# Altium PCB high_voltage_controller.PcbDoc (part 1 of 4)
Units mil, origin at the board's own origin, x right, y up, seen from the top; angles counter-clockwise.
Board outline 3135 x 1815 mil, 4 copper layers (Signal 1, Ground, Power, Signal 2), stack 23.756 mil thick; 57 components, 42 nets, 253 pads, 87 vias.
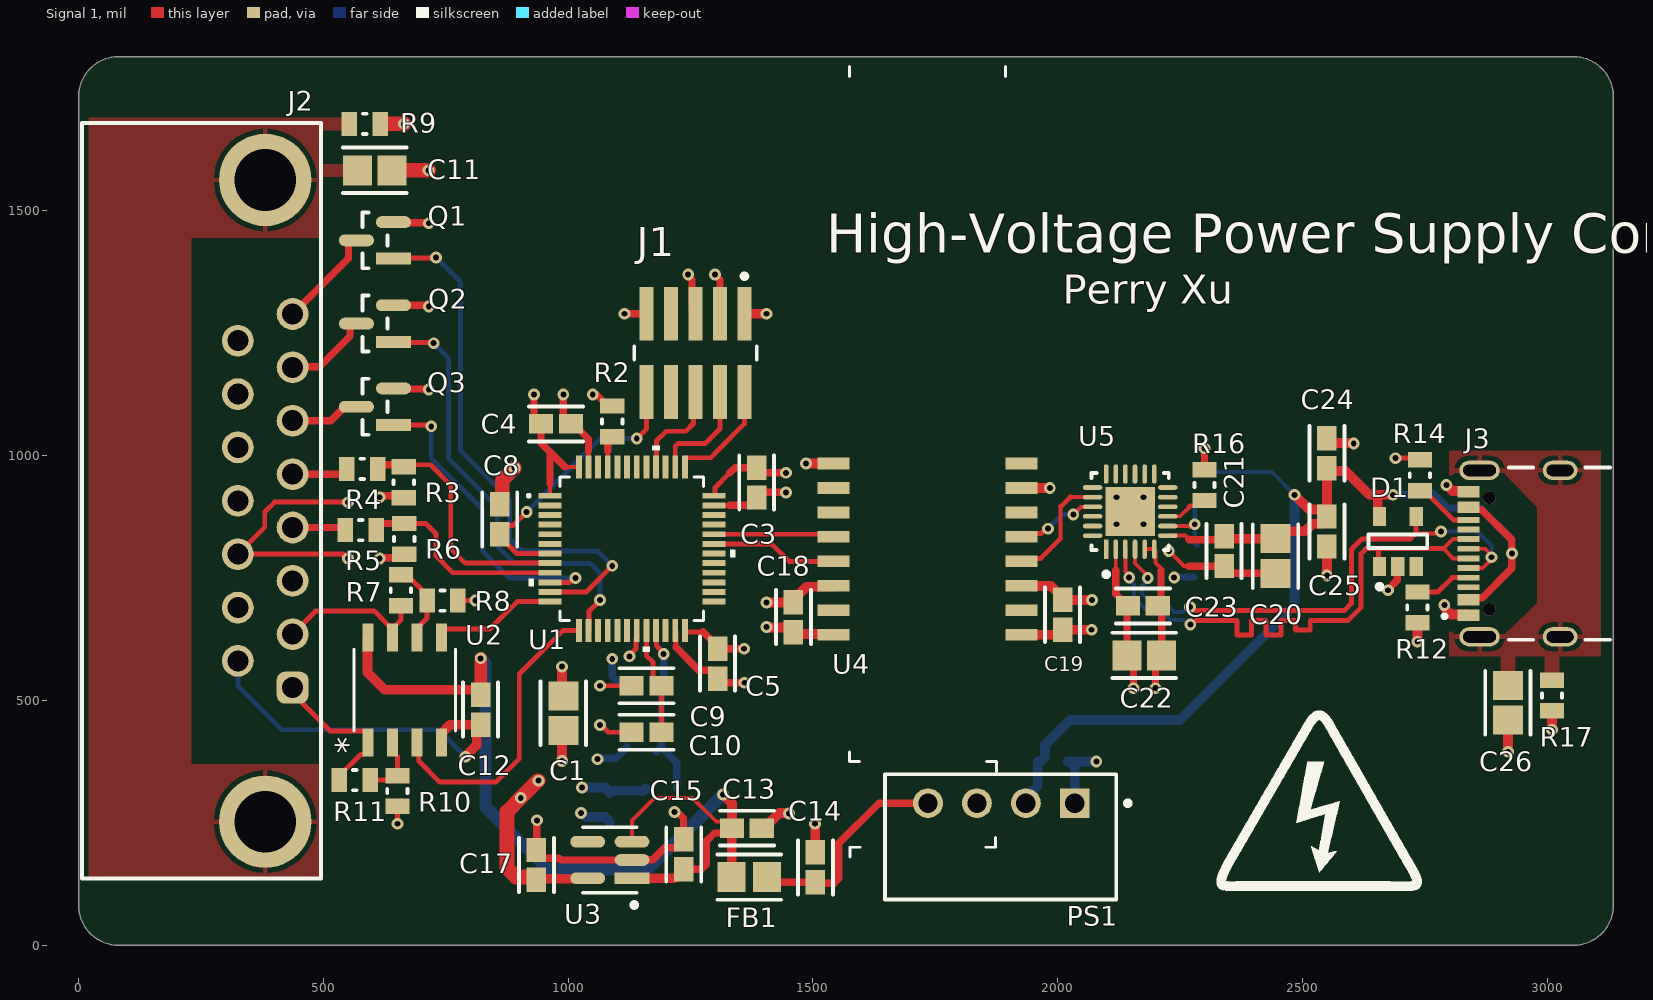
[diagram p0: Signal 1 view]
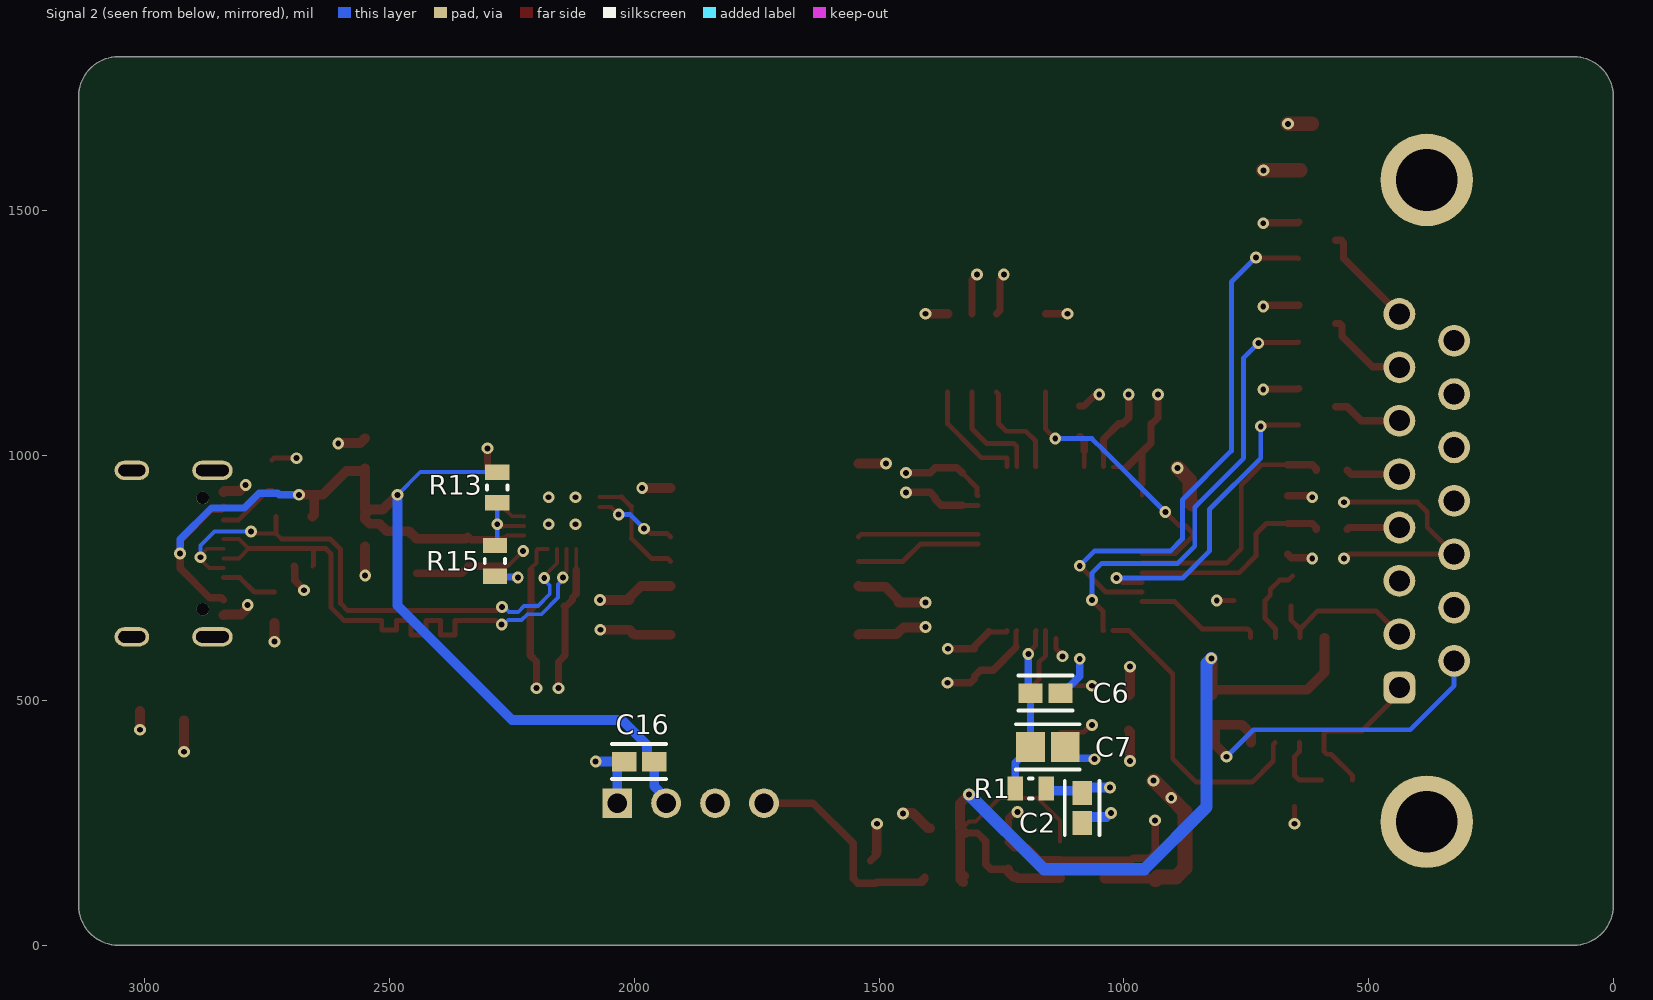
[diagram p1: Signal 2 view, seen from below]
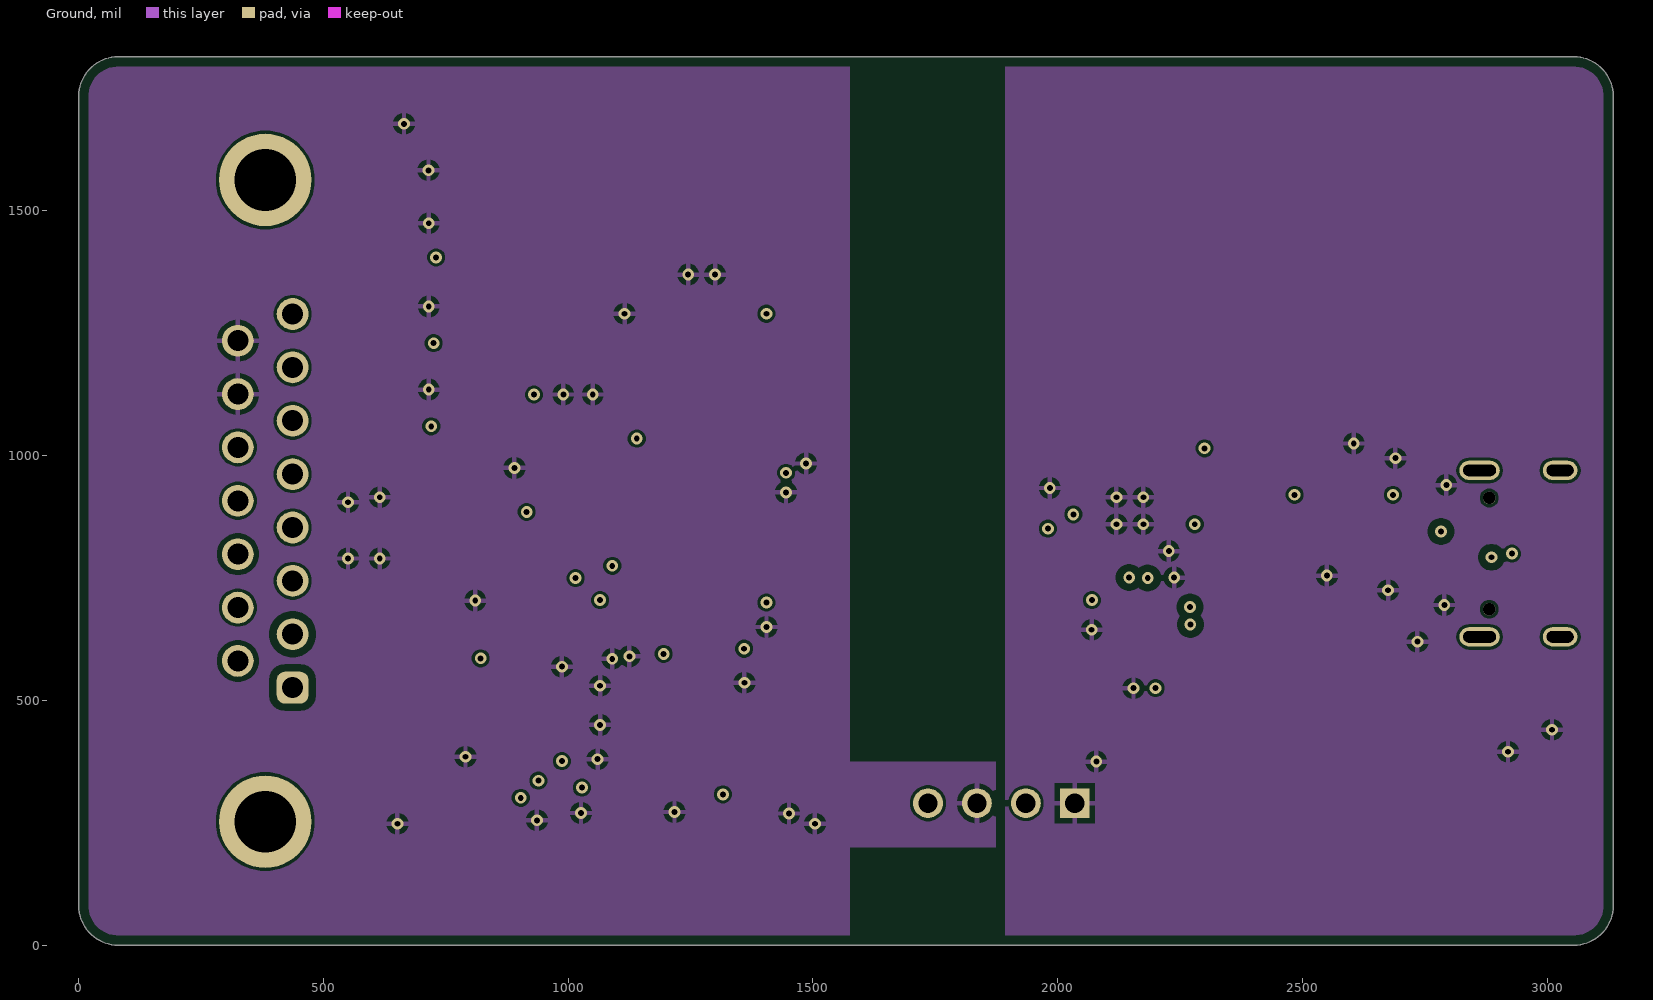
[diagram p2: Ground]
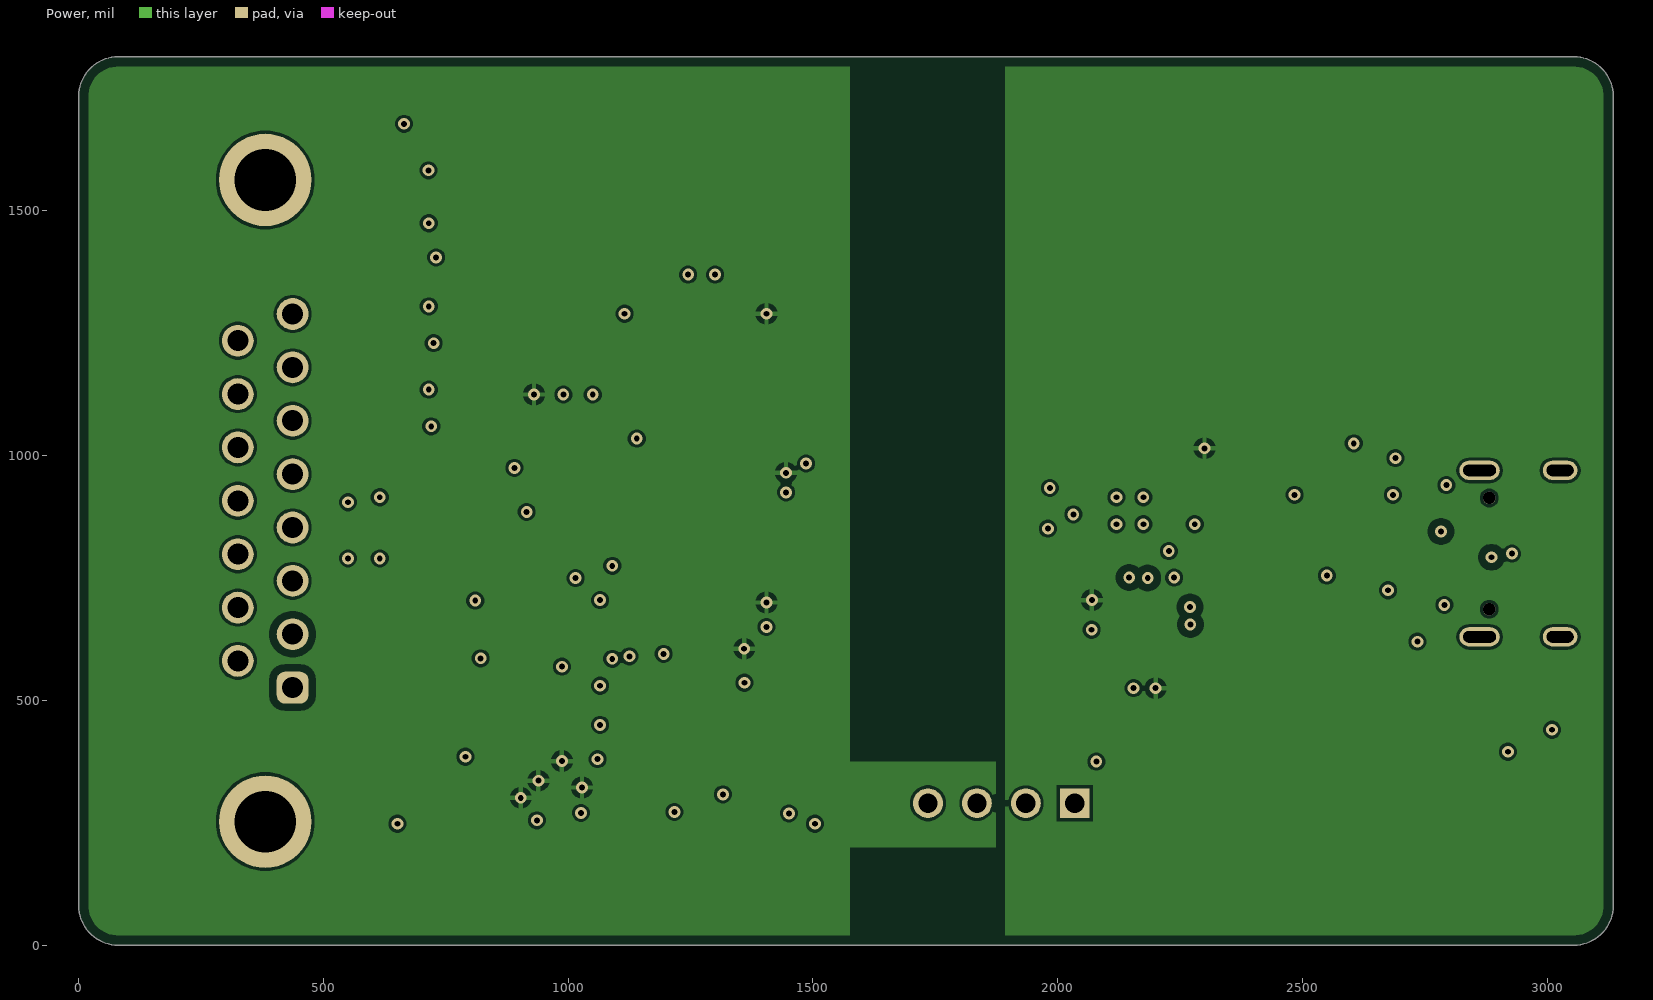
[diagram p3: Power]
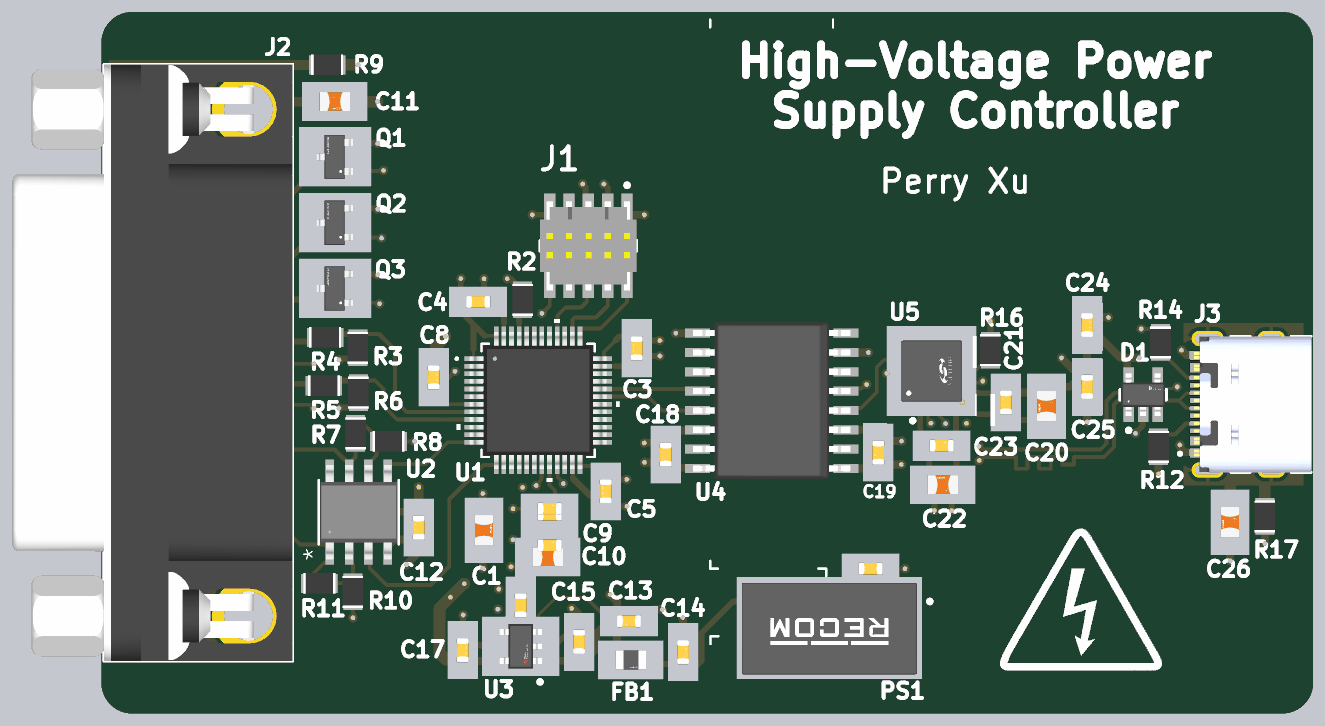
[diagram p4: 3D render of the assembled board from above, using the file's embedded part models]
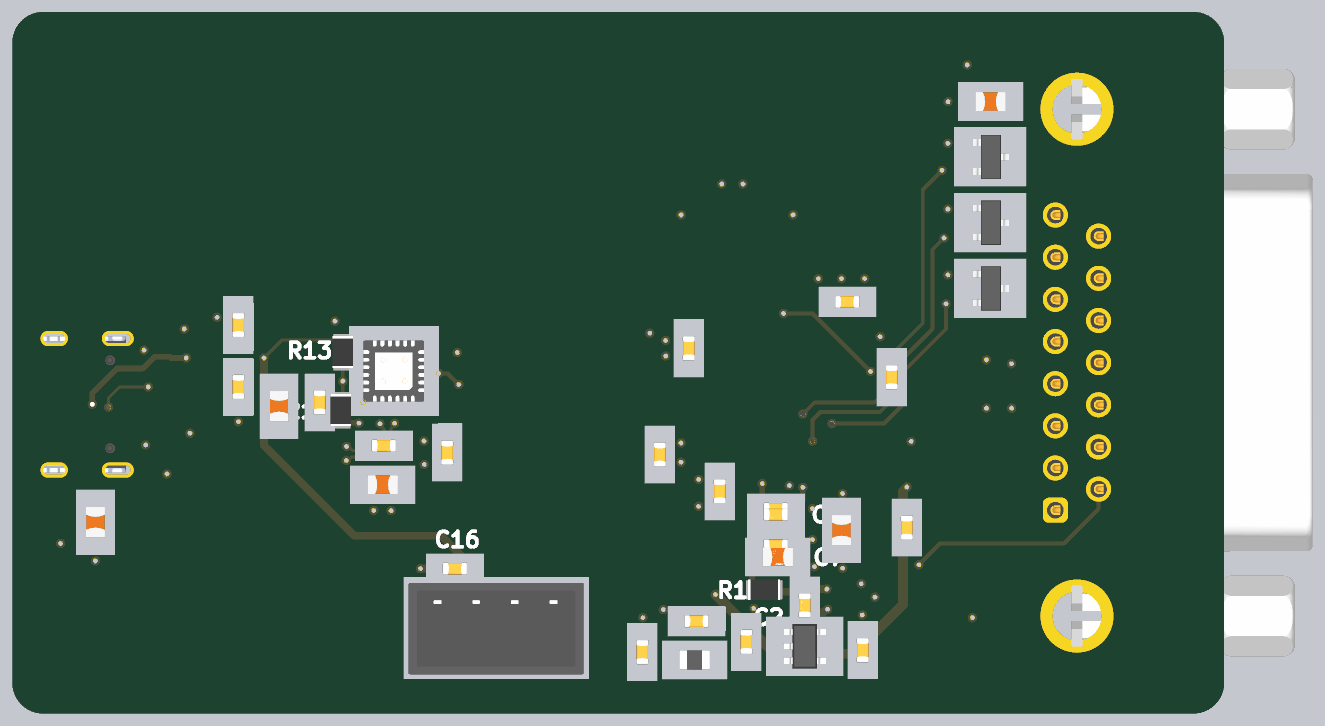
[diagram p5: 3D render of the assembled board from below, using the file's embedded part models]

## Layer stack, top to bottom
Top Solder: solder mask 0.4, Solder Resist, Dk 3.5
Signal 1: signal copper 1.4
Dielectric 2: prepreg 2.8, PP-006, Dk 4.1
Ground: signal copper 1.378
Dielectric 1: dielectric 12.6, FR-4, Dk 4.8
Power: signal copper 1.378
Dielectric 3: prepreg 2.8, PP-006, Dk 4.1
Signal 2: signal copper 1.4
Bottom Solder: solder mask 0.4, Solder Resist, Dk 3.5

## Board outline
80,0 cw(c80,80) 0,80 0,1735 cw(c80,1735) 80,1815 3055,1815 cw(c3055,1735) 3135,1735 3135,80 cw(c3055,80) 3055,0

## Design rules (kind name [scope] priority, off if disabled: settings)
BoardOutlineClearance [All] p1: gap=20 ignorepadtopadclearanceinfootprint=FALSE
Clearance USB_DATA_CLEARANCE [InNetClass('USB_DATA_NETS')] p1: gap=15 ignorepadtopadclearanceinfootprint=FALSE
Clearance ANALOG_CLEARANCE [InNetClass('ANALOG_NETS') vs Not WithinRoom('MCU_ROOM')] p2: gap=15 ignorepadtopadclearanceinfootprint=FALSE
Clearance [All] p3: gap=6 ignorepadtopadclearanceinfootprint=FALSE
ComponentClearance [All] p1: gap=10 collisioncheckmode=3 verticalgap=10 showdistances=FALSE checkcomponentboundary=TRUE
DiffPairsRouting [All] p1: maxlimit=10 minlimit=10 mostfreqgap=10 toplayer_minwidth=8 toplayer_maxwidth=20 toplayer_prefwidth=10 midlayer1_minwidth=8 midlayer1_maxwidth=20 midlayer1_prefwidth=10 midlayer2_minwidth=8 midlayer2_maxwidth=20 midlayer2_prefwidth=10 bottomlayer_minwidth=8 bottomlayer_maxwidth=20 bottomlayer_prefwidth=10 maxuncoupledlength=500
PolygonConnect USB_SHIELD_POUR_CONNECT [InNet('USB_SHIELD_POUR')] p1: thpad.connectstyle=Relief thpad.reliefconductorwidth=10 thpad.reliefentries=4 thpad.polygonreliefangle="90 Angle" thpad.airgapwidth=10 smdpad.connectstyle=Direct smdpad.reliefconductorwidth=10 smdpad.reliefentries=4 smdpad.polygonreliefangle="90 Angle" smdpad.airgapwidth=10 via.connectstyle=Relief via.reliefconductorwidth=10 via.reliefentries=4 via.polygonreliefangle="90 Angle" via.airgapwidth=10
PolygonConnect DB15_SHIELD_POUR_CONNECT [InNet('DB15_SHIELD_POUR')] p2: thpad.connectstyle=Relief thpad.reliefconductorwidth=10 thpad.reliefentries=4 thpad.polygonreliefangle="90 Angle" thpad.airgapwidth=10 smdpad.connectstyle=Direct smdpad.reliefconductorwidth=10 smdpad.reliefentries=4 smdpad.polygonreliefangle="90 Angle" smdpad.airgapwidth=10 via.connectstyle=Direct via.reliefconductorwidth=10 via.reliefentries=4 via.polygonreliefangle="90 Angle" via.airgapwidth=10
PolygonConnect DB15_PINS_9_11_NO_POLYGON_CONNECT [InComponent('J2') And ((Name='J2-9') Or (Name='J2-11'))] p3: connectstyle=NoConnect reliefconductorwidth=10 reliefentries=4 polygonreliefangle="90 Angle" airgapwidth=10
PolygonConnect [All] p4: connectstyle=Relief reliefconductorwidth=10 reliefentries=4 polygonreliefangle="90 Angle" airgapwidth=10
RoomDefinition CP2102_ROOM [False vs False] p1: confinementstyle=ConfineIn formatcopy=TRUE lockcomponents=FALSE outline 2028,766 2268,766 2268,1006 2028,1006
RoomDefinition MCU_ROOM [False vs False] p2: confinementstyle=ConfineIn formatcopy=TRUE lockcomponents=FALSE outline 930,610 1330,610 1330,1010 930,1010
RoutingVias [All] p1: holewidth=12 width=24 viastyle="Through Hole" minholewidth=12 minwidth=24 maxholewidth=28 maxwidth=50
SolderMaskExpansion [All] p1: expansion=0 istentingtop=FALSE
SupplyNets "Schematic Supply Nets_5" [InNet('3V3')] p1: voltage=0.000
SupplyNets "Schematic Supply Nets_4" [InNet('VBUS')] p2: voltage=0.000
SupplyNets "Schematic Supply Nets_3" [InNet('USB_GND')] p3: voltage=0.000
SupplyNets "Schematic Supply Nets_2" [InNet('5V')] p4: voltage=0.000
SupplyNets "Schematic Supply Nets_1" [InNet('GND')] p5: voltage=0.000
SupplyNets "Schematic Supply Nets" [InNet('UART_USB_3V3')] p6: voltage=0.000
Width CP2102_NECK_DOWN [WithinRoom('CP2102_ROOM')] p1: maxlimit=8 minlimit=6 preferedwidth=8
Width MCU_NECK_DOWN [WithinRoom('MCU_ROOM')] p2: maxlimit=10 minlimit=6 preferedwidth=8
Width POWER_WIDTH [InNetClass('POWER_NETS')] p3: maxlimit=30 minlimit=6 preferedwidth=15
Width [All] p4: maxlimit=15 minlimit=6 preferedwidth=10
28 further rules are at their usual default settings.

## Classes and differential pairs
net class USB_DATA_NETS: D_N D_P
net class ANALOG_NETS: NetJ2_1 NetJ2_2 NetR7_2 NetR10_1
net class POWER_NETS: 3V3 5V DB15_SHIELD_POUR GND NetC6_1 NetC14_1 UART_USB_3V3 USB_GND USB_SHIELD_POUR VBUS
component class U_USB_INTERFACE: C18 C19 C20 C21 C22 C23 C24 C25 C26 D1 J3 R12 R13 R14 R15 R16 R17 U4 U5
component class U_SUPPLY_INTERFACE: 3 C11 C12 J2 Q1 Q2 Q3 R3 R4 R5 R6 R7 R8 R9 R10 R11 U2
component class U_POWER: C13 C14 C15 C16 C17 FB1 PS1 U3
component class U_MCU: C1 C2 C3 C4 C5 C6 C7 C8 C9 C10 J1 R1 R2 U1
differential pair D: +D_P -D_N

## Components (designator, comment, footprint, x,y, rotation, side; value= is the part's Value field where it differs from the comment)
C1 "4.7u" "C_IM 0805" 990,474 r90 top value=4.7µF
C2 "1u" "C_IM 0603" 1085,280 r270 bottom value=1µF
C3 "100n" "C_IM 0603" 1385,945 r270 top value=100nF
C4 "100n" "C_IM 0603" 975,1065 r0 top value=100nF
C5 "100n" "C_IM 0603" 1305,575 r270 top value=100nF
C6 "10n" "C_IM 0603" 1160,515 r180 bottom value=10nF
C7 "1u" "C_IM 0805" 1155,405 r180 bottom value=1µF
C8 "100n" "C_IM 0603" 860,870 r90 top value=100nF
C9 "100n" "C_IM 0603" 1160,530 r180 top value=100nF
C10 "1u" "C_IM 0603" 1160,435 r180 top value=1µF
C11 "4.7n" "C_IM 0805" 604.48,1583.01 r0 top value=4.7nF
C12 "1u" "C_IM 0603" 821,481 r270 top value=1µF
C13 "10u" "C_IM 0603" 1365,239 r0 top value=10µF
C14 "10u" "C_IM 0603" 1505,159 r90 top value=10µF
C15 "1u" "C_IM 0603" 1236,185.59 r90 top value=1µF
C16 "10u" "C_IM 0603" 1990,375 r0 bottom value=10µF
C17 "1u" "C_IM 0603" 935,164 r90 top value=1µF
C18 "100n" "C_IM 0603" 1460,670 r270 top value=100nF
C19 "100n" "C_IM 0603" 2010,675 r270 top value=100nF
C20 "4.7u" "C_IM 0805" 2445,795 r270 top value=4.7µF
C21 "100n" "C_IM 0603" 2340,805 r270 top value=100nF
C22 "4.7u" "C_IM 0805" 2177,592 r180 top value=4.7µF
C23 "100n" "C_IM 0603" 2174,693 r180 top value=100nF
C24 "100n" "C_IM 0603" 2550,1005 r90 top value=100nF
C25 "10u" "C_IM 0603" 2550,845 r270 top value=10µF
C26 "4.7n" "C_IM 0805" 2920,495 r270 top value=4.7nF
D1 "SP0504BAHTG" "SOT-23-5 Small" 2695,825 r90 top value=30pF
FB1 "BLM21PG221SN1D" "FB_IM 0805" 1370,139 r0 top value=220Ω
J1 "FTSH-105-01-L-DV-K" FTSH-105-01-L-DV-K 1260,1210 r180 top
J2 "618015231121" 618015231121 380.91,907.83 r270 top
J3 "USB4105-GF-A" GCT_USB4105-GF-A 2933,800 r90 top
PS1 "RFM-0505S" 4-SIP 1885,290 r180 top
Q1 "2N7002K" SOT-23-3 605,1440 r180 top value=2Ω
Q2 "2N7002K" SOT-23-3 605,1270 r180 top value=2Ω
Q3 "2N7002K" SOT-23-3 605,1100 r180 top value=2Ω
R1 "22" "R_IM 0805" 1190,320 r180 bottom value=22Ω
R2 "10k" "R_IM 0805" 1090,1070 r270 top value=10kΩ
R3 "10k" "R_IM 0805" 664,946 r270 top value=10kΩ
R4 "30k" "R_IM 0805" 579,973 r0 top value=30kΩ
R5 "30k" "R_IM 0805" 576,848 r0 top value=30kΩ
R6 "10k" "R_IM 0805" 665,830 r90 top value=10kΩ
R7 "10k" "R_IM 0805" 658,725 r90 top value=10kΩ
R8 "10k" "R_IM 0805" 743,704 r0 top value=10kΩ
R9 "1M" "R_IM 0805" 584.48,1678.01 r180 top value=1mF
R10 "10k" "R_IM 0805" 651,315 r270 top value=10kΩ
R11 "10k" "R_IM 0805" 564,337 r0 top value=10kΩ
R12 "5.1k" "R_IM 0805" 2735,690 r90 top value=5.1kΩ
R13 "22.1k" "R_IM 0805" 2280,935 r90 bottom value=22.1kΩ
R14 "5.1k" "R_IM 0805" 2740,960 r90 top value=5.1kΩ
R15 "47.5k" "R_IM 0805" 2285,785 r90 bottom value=47.5kΩ
R16 "1k" "R_IM 0805" 2300,940 r90 top value=1kΩ
R17 "1M" "R_IM 0805" 3010,510 r90 top value=1MΩ
U1 "STM32G431C6T6" LQFP48-7x7mm 1130,810 r0 top
U2 "TLV9002QDRQ1" SOIC8_D_TEX 666,521 r90 top
U3 "TLV75533PDBVR" SOT-23-5 1085,174 r180 top
U4 "ISO7721FDWR" 16-SOIC 1734,809 r180 top
U5 "CP2102N-A02-GQFN24R" 24-VFQFN 2148.18,885.79 r90 top

## Footprints (in the part's own frame and the unit in brackets; to place one, negate y for a bottom-side part, rotate by r counter-clockwise, add the part's x,y. Pads: shape width x height; smd on the part's side, far side on the other; paste and mask are expansions set on the pad)
4-SIP [mm]
  rect 1.55x1.55 hole 1 paste-2539.97 mask+0: 1(-3.81,0)
  round 1.55 hole 1 paste-2539.97 mask+0: 2(-1.27,0) 3(1.27,0) 4(3.81,0)
  silkscreen extent -6.69,-1.5 6.04,5, body extent -6.06,-1.6 6.14,5.1, height 0.25
16-SOIC [mm]
  rect 1.65x0.6 smd paste+0 mask+0: 1(-4.875,4.445) 2(-4.875,3.175) 3(-4.875,1.905) 4(-4.875,0.635) 5(-4.875,-0.635) 6(-4.875,-1.905) 7(-4.875,-3.175) 8(-4.875,-4.445) 9(4.875,-4.445) 10(4.875,-3.175) 11(4.875,-1.905) 12(4.875,-0.635) 13(4.875,0.635) 14(4.875,1.905) 15(4.875,3.175) 16(4.875,4.445)
  body extent -5.17,-5.15 5.16,5.15, height 2.59
24-VFQFN [mm]
  rect 1.01x0.239 smd paste+0 mask+0: 1(-1.951,1.25)
  rrect100% 1.01x0.239 smd paste+0 mask+0: 2(-1.951,0.75) 3(-1.951,0.25) 4(-1.951,-0.25) 5(-1.951,-0.75) 6(-1.951,-1.25) 13(1.951,-1.25) 14(1.951,-0.75) 15(1.951,-0.25) 16(1.951,0.25) 17(1.951,0.75) 18(1.951,1.25)
  rrect100% 0.239x1.01 smd paste+0 mask+0: 7(-1.25,-1.951) 8(-0.75,-1.951) 9(-0.25,-1.951) 10(0.25,-1.951) 11(0.75,-1.951) 12(1.25,-1.951) 19(1.25,1.951) 20(0.75,1.951) 21(0.25,1.951) 22(-0.25,1.951) 23(-0.75,1.951) 24(-1.25,1.951)
  rect 2.55x2.55 smd paste-1000 mask+0: 25(0,0)
  silkscreen extent -3.38,-2 2,2, body extent -2.96,-2.96 2.96,2.96, height 0.25
618015231121 [mm]
  rrect50% 1.65x1.65 hole 1.09: 1(9.695,1.42)
  round 1.65 hole 1.09: 2(6.925,1.42) 3(4.155,1.42) 4(1.385,1.42) 5(-1.385,1.42) 6(-4.155,1.42) 7(-6.925,1.42) 8(-9.695,1.42) 9(8.31,-1.42) 10(5.54,-1.42) 11(2.77,-1.42) 12(0,-1.42) 13(-2.77,-1.42) 14(-5.54,-1.42) 15(-8.31,-1.42)
  round 4.8 hole 3.2: M1(-16.65,0) M2(16.65,0)
  silkscreen extent -19.6,-9.5 19.6,2.9, body extent -19.6,-15.5 19.6,2.9, height 12.55
"C_IM 0603" [mil]
  rect 49.53x39.85 smd paste+0 mask+0: 1(-30.59,0) 2(30.59,0)
  silkscreen extent -55,-36 55,36, body extent -31,-16 31,16, height 35
"C_IM 0805" [mil]
  rect 59.24x61.27 smd paste+0 mask+0: 1(-35.46,0) 2(35.46,0)
  silkscreen extent -65,-46 65,46, body extent -85,-50 85,50, height 10
"FB_IM 0805" [mil]
  rect 57.28x61.27 smd paste+0 mask+0: 1(-36.44,0) 2(36.44,0)
  silkscreen extent -65,-46 65,46, body extent -85,-50 85,50, height 10
FTSH-105-01-L-DV-K [mm]
  rect 0.74x2.79 smd: 1(-2.54,-2.035) 2(-2.54,2.035) 3(-1.27,-2.035) 4(-1.27,2.035) 5(0,-2.035) 6(0,2.035) 7(1.27,-2.035) 8(1.27,2.035) 9(2.54,-2.035) 10(2.54,2.035)
  silkscreen extent -3.17,-4.1 3.17,0.34, body extent -3.17,-2.92 3.18,2.92, height 6.12
GCT_USB4105-GF-A [mm]
  rect 0.6x1.15 smd mask+0.05: A1_B12(-3.2,2.378) A4_B9(-2.4,2.378) B1_A12(3.2,2.378) B4_A9(2.4,2.378)
  rect 0.3x1.15 smd mask+0.05: A5(-1.25,2.378) A6(-0.25,2.378) A7(0.25,2.378) A8(1.25,2.378) B5(1.75,2.378) B6(0.75,2.378) B7(-0.75,2.378) B8(-1.75,2.378)
  oval 1x2.1 hole 0.6 slot 1.7 at 90 deg: SH1(-4.32,1.803) SH2(4.32,1.803)
  oval 1x1.8 hole 0.6 slot 1.4 at 90 deg: SH3(-4.32,-2.377) SH4(4.32,-2.377)
  round 0.65 hole 0.65 unplated: ""(-2.89,1.303) ""(2.89,1.303)
  silkscreen extent -4.47,-4.98 4.47,3.72, body extent -4.47,-5.01 4.47,2.7, height 3.32
LQFP48-7x7mm [mil]
  rect 47x12 smd paste+0 mask+0: 1(-167.32,108.27) 2(-167.32,88.58) 3(-167.32,68.9) 4(-167.32,49.21) 5(-167.32,29.53) 6(-167.32,9.84) 7(-167.32,-9.84) 8(-167.32,-29.53) 9(-167.32,-49.21) 10(-167.32,-68.9) 11(-167.32,-88.58) 12(-167.32,-108.27) 25(167.32,-108.27) 26(167.32,-88.58) 27(167.32,-68.9) 28(167.32,-49.21) 29(167.32,-29.53) 30(167.32,-9.84) 31(167.32,9.84) 32(167.32,29.53) 33(167.32,49.21) 34(167.32,68.9) 35(167.32,88.58) 36(167.32,108.27)
  rect 12x47 smd paste+0 mask+0: 13(-108.27,-167.32) 14(-88.58,-167.32) 15(-68.9,-167.32) 16(-49.21,-167.32) 17(-29.53,-167.32) 18(-9.84,-167.32) 19(9.84,-167.32) 20(29.53,-167.32) 21(49.21,-167.32) 22(68.9,-167.32) 23(88.58,-167.32) 24(108.27,-167.32) 37(108.27,167.32) 38(88.58,167.32) 39(68.9,167.32) 40(49.21,167.32) 41(29.53,167.32) 42(9.84,167.32) 43(-9.84,167.32) 44(-29.53,167.32) 45(-49.21,167.32) 46(-68.9,167.32) 47(-88.58,167.32) 48(-108.27,167.32)
  silkscreen extent -214,-211 211,211, body extent -177,-177 177,177, height 63
"R_IM 0805" [mm]
  rect 0.8x1.25 smd: 1(-0.8,0) 2(0.8,0)
  silkscreen extent -0.1,-0.53 0.1,0.53, body extent -1.05,-0.67 1.05,0.68, height 0.6
SOIC8_D_TEX [mil]
  rect 57.5x22 smd paste+0 mask+0: 1(-107.25,75) 2(-107.25,25) 3(-107.25,-25) 4(-107.25,-75) 5(107.25,-75) 6(107.25,-25) 7(107.25,25) 8(107.25,75)
  silkscreen extent -84,-104 84,104, body extent -122,-99 122,99, height 69
SOT-23-3 [mm]
  rect 1.824x0.618 smd paste+0 mask+0: 1(-0.96,0.95)
  rrect100% 1.824x0.618 smd paste+0 mask+0: 2(-0.96,-0.95) 3(0.96,0)
  silkscreen extent -0.65,-1.45 0.65,1.45, body extent -2.37,-1.95 2.37,1.95, height 0.25
SOT-23-5 [mm]
  rect 1.805x0.612 smd paste+0 mask+0: 1(-1.15,0.95)
  rrect100% 1.805x0.612 smd paste+0 mask+0: 2(-1.15,0) 3(-1.15,-0.95) 4(1.15,-0.95) 5(1.15,0.95)
  silkscreen extent -1.4,-1.7 1.4,2.46, body extent -2.55,-1.95 2.55,1.95, height 0.25
"SOT-23-5 Small" [mm]
  rect 0.99x0.69 smd paste+0 mask+0: 1(-1.295,0.95) 2(-1.295,0) 3(-1.295,-0.95) 4(1.295,-0.95) 5(1.295,0.95)
  silkscreen extent -2.47,-1.53 0.35,1.53, body extent -1.89,-1.63 1.89,1.63, height 0.25

## Part data
C1 C20 C22: library part CC0805KKX5R5BB475, "Surface Mount Ceramic Multilayer Capacitor 4.7uF 10% X5R 6.3V 0805 Blister T/R", Case Code (Imperial)=0805, Case Code (Metric)=2012, Dielectric=X5R, Dielectric Material=Ceramic, Manufacturer="Yageo Group", Manufacturer Package Identifier=CC0805-0.85, Max Operating Temperature=85°C, Min Operating Temperature=-55°C, Supplier Part Number=311-1861-1-ND, Tolerance=10%, Voltage Rating=6.3V, Case/Package=0805, Category="Ceramic Capacitors", China RoHS=Compliant, ComponentLink1Description=https://datasheet.octopart.com:443/CC0805KKX5R5BB475-Yageo-datasheet-170350636.pdf?src-supplier=IHS, ComponentLink1URL=https://datasheet.octopart.com:443/CC0805KKX5R5BB475-Yageo-datasheet-170350636.pdf?src-supplier=IHS, ComponentLink2Description=https://datasheet.octopart.com:443/CC0805KKX5R5BB475-Yageo-datasheet-78855689.pdf?src-supplier=Upverter, ComponentLink2URL=https://datasheet.octopart.com:443/CC0805KKX5R5BB475-Yageo-datasheet-78855689.pdf?src-supplier=Upverter, ComponentLink3Description=https://datasheet.octopart.com:443/CC0805KKX5R5BB475-Yageo-datasheet-140260304.pdf?src-supplier=element14+APAC, ComponentLink3URL=https://datasheet.octopart.com:443/CC0805KKX5R5BB475-Yageo-datasheet-140260304.pdf?src-supplier=element14+APAC, ComponentLink4Description=https://datasheet.octopart.com:443/CC0805KKX5R5BB475-Yageo-datasheet-182029903.pdf?src-supplier=Farnell, ComponentLink4URL=https://datasheet.octopart.com:443/CC0805KKX5R5BB475-Yageo-datasheet-182029903.pdf?src-supplier=Farnell, ComponentLink5Description=https://datasheet.octopart.com/CC0805KKX5R5BB475-Yageo-datasheet-86397281.pdf, ComponentLink5URL=https://datasheet.octopart.com/CC0805KKX5R5BB475-Yageo-datasheet-86397281.pdf, ComponentLink6Description=https://datasheet.octopart.com:443/CC0805KKX5R5BB475-Yageo-datasheet-8324442.pdf?src-supplier=Newark, ComponentLink6URL=https://datasheet.octopart.com:443/CC0805KKX5R5BB475-Yageo-datasheet-8324442.pdf?src-supplier=Newark, ComponentLink7Description=https://datasheet.octopart.com:443/CC0805KKX5R5BB475-Yageo-datasheet-158238148.pdf?src-supplier=Newark, ComponentLink7URL=https://datasheet.octopart.com:443/CC0805KKX5R5BB475-Yageo-datasheet-158238148.pdf?src-supplier=Newark, ComponentLink8Description=https://datasheet.octopart.com:443/CC0805KKX5R5BB475-Yageo-datasheet-62067349.pdf?src-supplier=Newark, ComponentLink8URL=https://datasheet.octopart.com:443/CC0805KKX5R5BB475-Yageo-datasheet-62067349.pdf?src-supplier=Newark, ComponentLink9Description=https://datasheet.octopart.com:443/CC0805KKX5R5BB475-Yageo-Group-datasheet-184398209.pdf?src-supplier=LCSC, ComponentLink9URL=https://datasheet.octopart.com:443/CC0805KKX5R5BB475-Yageo-Group-datasheet-184398209.pdf?src-supplier=LCSC, ComponentLink10Description=https://datasheet.octopart.com:443/CC0805KKX5R5BB475-Yageo-datasheet-149070021.pdf?src-supplier=TME, ComponentLink10URL=https://datasheet.octopart.com:443/CC0805KKX5R5BB475-Yageo-datasheet-149070021.pdf?src-supplier=TME, ComponentLink11Description=https://datasheet.octopart.com:443/CC0805KKX5R5BB475-Yageo-Group-datasheet-145016144.pdf?src-supplier=ODG+(Origin+Data+Global), ComponentLink11URL=https://datasheet.octopart.com:443/CC0805KKX5R5BB475-Yageo-Group-datasheet-145016144.pdf?src-supplier=ODG+(Origin+Data+Global), ComponentLink12Description=https://datasheet.octopart.com:443/CC0805KKX5R5BB475-Yageo-datasheet-137875056.pdf?src-supplier=Future+Electronics, ComponentLink12URL=https://datasheet.octopart.com:443/CC0805KKX5R5BB475-Yageo-datasheet-137875056.pdf?src-supplier=Future+Electronics, ComponentLink13Description=https://datasheet.octopart.com:443/CC0805KKX5R5BB475-Yageo-datasheet-137700082.pdf?src-supplier=Future+Electronics, ComponentLink13URL=https://datasheet.octopart.com:443/CC0805KKX5R5BB475-Yageo-datasheet-137700082.pdf?src-supplier=Future+Electronics, ComponentLink14Description=https://datasheet.octopart.com:443/CC0805KKX5R5BB475-Yageo-datasheet-137700085.pdf?src-supplier=Future+Electronics, ComponentLink14URL=https://datasheet.octopart.com:443/CC0805KKX5R5BB475-Yageo-datasheet-137700085.pdf?src-supplier=Future+Electronics, ComponentLink15Description=https://datasheet.octopart.com:443/CC0805KKX5R5BB475-Yageo-datasheet-24580494.pdf?src-supplier=Future+Electronics, ComponentLink15URL=https://datasheet.octopart.com:443/CC0805KKX5R5BB475-Yageo-datasheet-24580494.pdf?src-supplier=Future+Electronics, ComponentLink16Description=https://datasheet.octopart.com:443/CC0805KKX5R5BB475-Yageo-datasheet-14389981.pdf?src-supplier=Future+Electronics, ComponentLink16URL=https://datasheet.octopart.com:443/CC0805KKX5R5BB475-Yageo-datasheet-14389981.pdf?src-supplier=Future+Electronics, ComponentLink17Description=https://datasheet.octopart.com:443/CC0805KKX5R5BB475-Yageo-datasheet-10911834.pdf?src-supplier=Future+Electronics, ComponentLink17URL=https://datasheet.octopart.com:443/CC0805KKX5R5BB475-Yageo-datasheet-10911834.pdf?src-supplier=Future+Electronics, ComponentLink18Description=http://sigma.octopart.com:80/conflict_mineral_statement/Yageo-company-3.pdf?src-supplier=Compliance+Statements, ComponentLink18URL=http://sigma.octopart.com:80/conflict_mineral_statement/Yageo-company-3.pdf?src-supplier=Compliance+Statements, ComponentLink19Description=http://sigma.octopart.com:80/rohs_statement/Yageo-company-2.pdf?src-supplier=Compliance+Statements, ComponentLink19URL=http://sigma.octopart.com:80/rohs_statement/Yageo-company-2.pdf?src-supplier=Compliance+Statements, Composition=Ceramic, Country of Origin="Mainland China, Taiwan", Depth=1.25mm, Export Control Classification Number (ECCN) Code=EAR99, Halogen Free="Halogen Free", Harmonized Tariff Schedule (HTS) Code=8532.24.00.20, Height=1.25mm, Introduction Date=2006-06-01, Lead Free="Lead Free", Length=2mm, Lifecycle Status=Production, Manufacturer Part Number=CC0805KKX5R5BB475, Material=Ceramic, Mounting Technology="Surface Mount", Number of Terminals=2, Packaging="Tape & Reel (TR)", Pins=2, Pricing="1=0.2, 10=0.112, 50=0.0796, 100=0.0696, 500=0.05296, 1000=0.04784 (USD)", Radiation Hardening=No, REACH SVHC=Yes, RoHS=Compliant, Schedule B="8532240020, 8532240020|8532240020|8532240020|8532240020|8532240020", Stock=20325, Supplier=DigiKey, Supplier 1=DigiKey, Supplier Part Number 1=311-1861-1-ND, Termination=SMD/SMT, Thickness=1.4478mm, Voltage Rating (DC)=6.3V, Weight=5.499807mg, Width=1.25mm
C2 C10: library part CC0603MRX5R5BB105, "6.3V 1uF X5R ±20% 0603 Multilayer Ceramic Capacitors MLCC - SMD/SMT ROHS", Case Code (Imperial)=0603, Case Code (Metric)=1608, Dielectric=X5R, Dielectric Material=Ceramic, Manufacturer="Yageo Group", Max Operating Temperature=85°C, Min Operating Temperature=-55°C, Supplier Part Number=311-1813-1-ND, Tolerance=20%, Voltage Rating=6.3V, Case/Package=0603, Category="Ceramic Capacitors", China RoHS=Compliant, ComponentLink1Description=https://datasheet.octopart.com:443/CC0603MRX5R5BB105-Yageo-datasheet-170350636.pdf?src-supplier=IHS, ComponentLink1URL=https://datasheet.octopart.com:443/CC0603MRX5R5BB105-Yageo-datasheet-170350636.pdf?src-supplier=IHS, ComponentLink2Description=https://datasheet.octopart.com:443/CC0603MRX5R5BB105-Yageo-datasheet-82288757.pdf?src-supplier=Upverter, ComponentLink2URL=https://datasheet.octopart.com:443/CC0603MRX5R5BB105-Yageo-datasheet-82288757.pdf?src-supplier=Upverter, ComponentLink3Description=https://datasheet.octopart.com:443/CC0603MRX5R5BB105-Yageo-datasheet-181968798.pdf?src-supplier=Farnell, ComponentLink3URL=https://datasheet.octopart.com:443/CC0603MRX5R5BB105-Yageo-datasheet-181968798.pdf?src-supplier=Farnell, ComponentLink4Description=https://datasheet.octopart.com/CC0603MRX5R5BB105-Yageo-datasheet-86397281.pdf, ComponentLink4URL=https://datasheet.octopart.com/CC0603MRX5R5BB105-Yageo-datasheet-86397281.pdf, ComponentLink5Description=https://datasheet.octopart.com:443/CC0603MRX5R5BB105-Yageo-datasheet-8324442.pdf?src-supplier=Newark, ComponentLink5URL=https://datasheet.octopart.com:443/CC0603MRX5R5BB105-Yageo-datasheet-8324442.pdf?src-supplier=Newark, ComponentLink6Description=https://datasheet.octopart.com:443/CC0603MRX5R5BB105-Yageo-Group-datasheet-184398209.pdf?src-supplier=LCSC, ComponentLink6URL=https://datasheet.octopart.com:443/CC0603MRX5R5BB105-Yageo-Group-datasheet-184398209.pdf?src-supplier=LCSC, ComponentLink7Description=https://datasheet.octopart.com:443/CC0603MRX5R5BB105-Yageo-Group-datasheet-145016144.pdf?src-supplier=ODG+(Origin+Data+Global), ComponentLink7URL=https://datasheet.octopart.com:443/CC0603MRX5R5BB105-Yageo-Group-datasheet-145016144.pdf?src-supplier=ODG+(Origin+Data+Global), ComponentLink8Description=https://datasheet.octopart.com:443/CC0603MRX5R5BB105-Yageo-datasheet-137875056.pdf?src-supplier=Future+Electronics, ComponentLink8URL=https://datasheet.octopart.com:443/CC0603MRX5R5BB105-Yageo-datasheet-137875056.pdf?src-supplier=Future+Electronics, ComponentLink9Description=https://datasheet.octopart.com:443/CC0603MRX5R5BB105-Yageo-datasheet-137700082.pdf?src-supplier=Future+Electronics, ComponentLink9URL=https://datasheet.octopart.com:443/CC0603MRX5R5BB105-Yageo-datasheet-137700082.pdf?src-supplier=Future+Electronics, ComponentLink10Description=https://datasheet.octopart.com:443/CC0603MRX5R5BB105-Yageo-datasheet-137700085.pdf?src-supplier=Future+Electronics, ComponentLink10URL=https://datasheet.octopart.com:443/CC0603MRX5R5BB105-Yageo-datasheet-137700085.pdf?src-supplier=Future+Electronics, ComponentLink11Description=https://datasheet.octopart.com:443/CC0603MRX5R5BB105-Yageo-datasheet-15895757.pdf?src-supplier=Future+Electronics, ComponentLink11URL=https://datasheet.octopart.com:443/CC0603MRX5R5BB105-Yageo-datasheet-15895757.pdf?src-supplier=Future+Electronics, ComponentLink12Description=https://datasheet.octopart.com:443/CC0603MRX5R5BB105-Yageo-datasheet-14389981.pdf?src-supplier=Future+Electronics, ComponentLink12URL=https://datasheet.octopart.com:443/CC0603MRX5R5BB105-Yageo-datasheet-14389981.pdf?src-supplier=Future+Electronics, ComponentLink13Description=https://datasheet.octopart.com:443/CC0603MRX5R5BB105-Yageo-datasheet-10911834.pdf?src-supplier=Future+Electronics, ComponentLink13URL=https://datasheet.octopart.com:443/CC0603MRX5R5BB105-Yageo-datasheet-10911834.pdf?src-supplier=Future+Electronics, ComponentLink14Description=http://sigma.octopart.com:80/conflict_mineral_statement/Yageo-company-3.pdf?src-supplier=Compliance+Statements, ComponentLink14URL=http://sigma.octopart.com:80/conflict_mineral_statement/Yageo-company-3.pdf?src-supplier=Compliance+Statements, ComponentLink15Description=http://sigma.octopart.com:80/rohs_statement/Yageo-company-2.pdf?src-supplier=Compliance+Statements, ComponentLink15URL=http://sigma.octopart.com:80/rohs_statement/Yageo-company-2.pdf?src-supplier=Compliance+Statements, Composition=Ceramic, Country of Origin="Mainland China, Taiwan", Depth=800µm, Export Control Classification Number (ECCN) Code=EAR99, Halogen Free="Halogen Free", Harmonized Tariff Schedule (HTS) Code=8532.24.00.20, Height=800µm, Introduction Date=2009-04-16, Lead Free="Lead Free", Length=1.6mm, Lifecycle Status=Production, Manufacturer Part Number=CC0603MRX5R5BB105, Material=Ceramic, Mounting Technology="Surface Mount", Number of Terminals=2, Packaging="Tape & Reel (TR)", Pins=2, Pricing="1=0.14, 10=0.078, 50=0.0544, 100=0.0472, 500=0.03518, 1000=0.03148 (USD)", REACH SVHC=Yes, RoHS=Compliant, Schedule B="8532240020, 8532240020|8532240020|8532240020|8532240020|8532240020", Stock=3638, Supplier=DigiKey, Supplier 1=DigiKey, Supplier Part Number 1=311-1813-1-ND, Termination=SMD/SMT, Thickness=889µm, Voltage Rating (DC)=6.3V, Weight=2.012816mg, Width=800µm
C3 C4 C5 C8 C9 C18 C19 C21 C23 C24: library part CC0603KRX7R9BB104, "Multilayer Ceramic Capacitor, CC Series, 0.1 - F, - 10%, X7R, 50 V, 0603 [1608 Metric]", Case Code (Imperial)=0603, Case Code (Metric)=1608, Dielectric=X7R, Dielectric Material=Ceramic, Manufacturer="Yageo Group", Max Operating Temperature=125°C, Min Operating Temperature=-55°C, Supplier Part Number=311-1344-1-ND, Tolerance=10%, Voltage=50V, Case/Package=0603, Category="Ceramic Capacitors", China RoHS=Compliant, ComponentLink1Description=https://datasheet.octopart.com:443/CC0603KRX7R9BB104-Yageo-datasheet-177165144.pdf?src-supplier=IHS, ComponentLink1URL=https://datasheet.octopart.com:443/CC0603KRX7R9BB104-Yageo-datasheet-177165144.pdf?src-supplier=IHS, ComponentLink2Description=https://datasheet.octopart.com:443/CC0603KRX7R9BB104-Yageo-datasheet-82288757.pdf?src-supplier=Upverter, ComponentLink2URL=https://datasheet.octopart.com:443/CC0603KRX7R9BB104-Yageo-datasheet-82288757.pdf?src-supplier=Upverter, ComponentLink3Description=https://datasheet.octopart.com:443/CC0603KRX7R9BB104-Yageo-datasheet-68298032.pdf?src-supplier=Upverter, ComponentLink3URL=https://datasheet.octopart.com:443/CC0603KRX7R9BB104-Yageo-datasheet-68298032.pdf?src-supplier=Upverter, ComponentLink4Description=https://datasheet.octopart.com:443/CC0603KRX7R9BB104-Yageo-Group-datasheet-189192896.pdf?src-supplier=Future+Electronics, ComponentLink4URL=https://datasheet.octopart.com:443/CC0603KRX7R9BB104-Yageo-Group-datasheet-189192896.pdf?src-supplier=Future+Electronics, ComponentLink5Description=https://datasheet.octopart.com:443/CC0603KRX7R9BB104-Yageo-datasheet-12526321.pdf?src-supplier=Future+Electronics, ComponentLink5URL=https://datasheet.octopart.com:443/CC0603KRX7R9BB104-Yageo-datasheet-12526321.pdf?src-supplier=Future+Electronics, ComponentLink6Description=https://datasheet.octopart.com:443/CC0603KRX7R9BB104-Yageo-datasheet-166511530.pdf?src-supplier=Future+Electronics, ComponentLink6URL=https://datasheet.octopart.com:443/CC0603KRX7R9BB104-Yageo-datasheet-166511530.pdf?src-supplier=Future+Electronics, ComponentLink7Description=https://datasheet.octopart.com:443/CC0603KRX7R9BB104-Yageo-datasheet-137700082.pdf?src-supplier=Future+Electronics, ComponentLink7URL=https://datasheet.octopart.com:443/CC0603KRX7R9BB104-Yageo-datasheet-137700082.pdf?src-supplier=Future+Electronics, ComponentLink8Description=https://datasheet.octopart.com:443/CC0603KRX7R9BB104-Yageo-datasheet-137700084.pdf?src-supplier=Future+Electronics, ComponentLink8URL=https://datasheet.octopart.com:443/CC0603KRX7R9BB104-Yageo-datasheet-137700084.pdf?src-supplier=Future+Electronics, ComponentLink9Description=https://datasheet.octopart.com:443/CC0603KRX7R9BB104-Yageo-datasheet-27626582.pdf?src-supplier=Future+Electronics, ComponentLink9URL=https://datasheet.octopart.com:443/CC0603KRX7R9BB104-Yageo-datasheet-27626582.pdf?src-supplier=Future+Electronics, ComponentLink10Description=https://datasheet.octopart.com:443/CC0603KRX7R9BB104-Yageo-datasheet-15895757.pdf?src-supplier=Future+Electronics, ComponentLink10URL=https://datasheet.octopart.com:443/CC0603KRX7R9BB104-Yageo-datasheet-15895757.pdf?src-supplier=Future+Electronics, ComponentLink11Description=https://datasheet.octopart.com:443/CC0603KRX7R9BB104-Yageo-datasheet-8324192.pdf?src-supplier=Future+Electronics, ComponentLink11URL=https://datasheet.octopart.com:443/CC0603KRX7R9BB104-Yageo-datasheet-8324192.pdf?src-supplier=Future+Electronics, ComponentLink12Description=https://datasheet.octopart.com/CC0603KRX7R9BB104-Yageo-datasheet-10883670.pdf, ComponentLink12URL=https://datasheet.octopart.com/CC0603KRX7R9BB104-Yageo-datasheet-10883670.pdf, ComponentLink13Description=https://datasheet.octopart.com:443/CC0603KRX7R9BB104-Yageo-datasheet-181968726.pdf?src-supplier=Newark, ComponentLink13URL=https://datasheet.octopart.com:443/CC0603KRX7R9BB104-Yageo-datasheet-181968726.pdf?src-supplier=Newark, ComponentLink14Description=https://datasheet.octopart.com:443/CC0603KRX7R9BB104-Yageo-datasheet-499490.pdf?src-supplier=Newark, ComponentLink14URL=https://datasheet.octopart.com:443/CC0603KRX7R9BB104-Yageo-datasheet-499490.pdf?src-supplier=Newark, ComponentLink15Description=https://datasheet.octopart.com:443/CC0603KRX7R9BB104-Yageo-datasheet-62336348.pdf?src-supplier=Newark, ComponentLink15URL=https://datasheet.octopart.com:443/CC0603KRX7R9BB104-Yageo-datasheet-62336348.pdf?src-supplier=Newark, ComponentLink16Description=https://datasheet.octopart.com:443/CC0603KRX7R9BB104-Yageo-datasheet-147453679.pdf?src-supplier=Newark, ComponentLink16URL=https://datasheet.octopart.com:443/CC0603KRX7R9BB104-Yageo-datasheet-147453679.pdf?src-supplier=Newark, ComponentLink17Description=https://datasheet.octopart.com:443/CC0603KRX7R9BB104-Yageo-datasheet-151948686.pdf?src-supplier=Farnell, ComponentLink17URL=https://datasheet.octopart.com:443/CC0603KRX7R9BB104-Yageo-datasheet-151948686.pdf?src-supplier=Farnell, ComponentLink18Description=https://datasheet.octopart.com:443/CC0603KRX7R9BB104-Yageo-datasheet-500777.pdf?src-supplier=Farnell, ComponentLink18URL=https://datasheet.octopart.com:443/CC0603KRX7R9BB104-Yageo-datasheet-500777.pdf?src-supplier=Farnell, ComponentLink19Description=https://datasheet.octopart.com:443/CC0603KRX7R9BB104-Yageo-datasheet-178019014.pdf?src-supplier=Burklin+Elektronik, ComponentLink19URL=https://datasheet.octopart.com:443/CC0603KRX7R9BB104-Yageo-datasheet-178019014.pdf?src-supplier=Burklin+Elektronik, ComponentLink20Description=https://datasheet.octopart.com:443/CC0603KRX7R9BB104-Yageo-Group-datasheet-165992755.pdf?src-supplier=ODG+(Origin+Data+Global), ComponentLink20URL=https://datasheet.octopart.com:443/CC0603KRX7R9BB104-Yageo-Group-datasheet-165992755.pdf?src-supplier=ODG+(Origin+Data+Global), ComponentLink21Description=https://datasheet.octopart.com:443/CC0603KRX7R9BB104-Yageo-datasheet-140260305.pdf?src-supplier=SOS+electronic, ComponentLink21URL=https://datasheet.octopart.com:443/CC0603KRX7R9BB104-Yageo-datasheet-140260305.pdf?src-supplier=SOS+electronic, ComponentLink22Description=https://datasheet.octopart.com:443/CC0603KRX7R9BB104-Yageo-datasheet-120101875.pdf?src-supplier=Megastar, ComponentLink22URL=https://datasheet.octopart.com:443/CC0603KRX7R9BB104-Yageo-datasheet-120101875.pdf?src-supplier=Megastar, ComponentLink23Description=https://datasheet.octopart.com:443/CC0603KRX7R9BB104-Yageo-datasheet-8701427.pdf?src-supplier=element14, ComponentLink23URL=https://datasheet.octopart.com:443/CC0603KRX7R9BB104-Yageo-datasheet-8701427.pdf?src-supplier=element14, ComponentLink24Description=https://datasheet.octopart.com:443/CC0603KRX7R9BB104-Yageo-datasheet-5301394.pdf?src-supplier=element14, ComponentLink24URL=https://datasheet.octopart.com:443/CC0603KRX7R9BB104-Yageo-datasheet-5301394.pdf?src-supplier=element14, ComponentLink25Description=https://datasheet.octopart.com:443/CC0603KRX7R9BB104-Yageo-datasheet-17600895.pdf?src-supplier=TME, ComponentLink25URL=https://datasheet.octopart.com:443/CC0603KRX7R9BB104-Yageo-datasheet-17600895.pdf?src-supplier=TME, ComponentLink26Description=http://sigma.octopart.com:80/15889575/rohs_statement/Yageo-CC0603KRX7R9BB104.pdf?src-supplier=Compliance+Statements, ComponentLink26URL=http://sigma.octopart.com:80/15889575/rohs_statement/Yageo-CC0603KRX7R9BB104.pdf?src-supplier=Compliance+Statements, ComponentLink27Description=http://sigma.octopart.com:80/conflict_mineral_statement/Yageo-company-3.pdf?src-supplier=Compliance+Statements, ComponentLink27URL=http://sigma.octopart.com:80/conflict_mineral_statement/Yageo-company-3.pdf?src-supplier=Compliance+Statements, Country of Origin="Mainland China, Taiwan", Depth=800µm, Export Control Classification Number (ECCN) Code=EAR99, Halogen Free="Halogen Free", Harmonized Tariff Schedule (HTS) Code=8532.24.00.20, Height=800µm, Introduction Date=2005-08-18, Lead Free="Lead Free", Length=1.6mm, Lifecycle Status=Production, Manufacturer Part Number=CC0603KRX7R9BB104, Material=Ceramic, Mounting Technology="Surface Mount", Number of Terminals=2, Pins=2, Pricing="1=0.1, 10=0.043, 50=0.0292, 100=0.0251, 500=0.01812, 1000=0.01598 (USD)", Radiation Hardening=No, REACH SVHC=Yes, RoHS=Compliant, Schedule B="8532240020, 8532240020|8532240020, 8532240020|8532240020|8532240020, 8532240020|8532240020|8532240020|8532240020", Stock=3228292, Supplier=DigiKey, Supplier 1=DigiKey, Supplier Part Number 1=311-1344-1-ND, Termination=SMD/SMT, Thickness=889µm, Voltage Rating=50V, Voltage Rating (DC)=50V, Width=800µm
C6: library part CC0603MRX7R9BB103, "50V 10nF X7R ±20% 0603 Multilayer Ceramic Capacitors MLCC - SMD/SMT ROHS", Case Code (Imperial)=0603, Case Code (Metric)=1608, Dielectric=X7R, Dielectric Material=Ceramic, Manufacturer="Yageo Group", Max Operating Temperature=125°C, Min Operating Temperature=-55°C, Supplier Part Number=311-1826-1-ND, Tolerance=20%, Voltage Rating=50V, Case/Package=0603, Category="Ceramic Capacitors", China RoHS=Compliant, ComponentLink1Description=https://datasheet.octopart.com:443/CC0603MRX7R9BB103-Yageo-datasheet-177165144.pdf?src-supplier=IHS, ComponentLink1URL=https://datasheet.octopart.com:443/CC0603MRX7R9BB103-Yageo-datasheet-177165144.pdf?src-supplier=IHS, ComponentLink2Description=https://datasheet.octopart.com:443/CC0603MRX7R9BB103-Yageo-datasheet-82288757.pdf?src-supplier=Upverter, ComponentLink2URL=https://datasheet.octopart.com:443/CC0603MRX7R9BB103-Yageo-datasheet-82288757.pdf?src-supplier=Upverter, ComponentLink3Description=https://datasheet.octopart.com:443/CC0603MRX7R9BB103-Yageo-datasheet-147453679.pdf?src-supplier=Farnell, ComponentLink3URL=https://datasheet.octopart.com:443/CC0603MRX7R9BB103-Yageo-datasheet-147453679.pdf?src-supplier=Farnell, ComponentLink4Description=https://datasheet.octopart.com:443/CC0603MRX7R9BB103-Yageo-datasheet-182029748.pdf?src-supplier=Farnell, ComponentLink4URL=https://datasheet.octopart.com:443/CC0603MRX7R9BB103-Yageo-datasheet-182029748.pdf?src-supplier=Farnell, ComponentLink5Description=https://datasheet.octopart.com:443/CC0603MRX7R9BB103-Yageo-datasheet-182029747.pdf?src-supplier=Farnell, ComponentLink5URL=https://datasheet.octopart.com:443/CC0603MRX7R9BB103-Yageo-datasheet-182029747.pdf?src-supplier=Farnell, ComponentLink6Description=https://datasheet.octopart.com:443/CC0603MRX7R9BB103-Yageo-datasheet-151948686.pdf?src-supplier=Farnell, ComponentLink6URL=https://datasheet.octopart.com:443/CC0603MRX7R9BB103-Yageo-datasheet-151948686.pdf?src-supplier=Farnell, ComponentLink7Description=https://datasheet.octopart.com:443/CC0603MRX7R9BB103-Yageo-datasheet-62336348.pdf?src-supplier=element14+APAC, ComponentLink7URL=https://datasheet.octopart.com:443/CC0603MRX7R9BB103-Yageo-datasheet-62336348.pdf?src-supplier=element14+APAC, ComponentLink8Description=https://datasheet.octopart.com/CC0603MRX7R9BB103-Yageo-datasheet-10883670.pdf, ComponentLink8URL=https://datasheet.octopart.com/CC0603MRX7R9BB103-Yageo-datasheet-10883670.pdf, ComponentLink9Description=https://datasheet.octopart.com:443/CC0603MRX7R9BB103-Yageo-datasheet-166511530.pdf?src-supplier=Future+Electronics, ComponentLink9URL=https://datasheet.octopart.com:443/CC0603MRX7R9BB103-Yageo-datasheet-166511530.pdf?src-supplier=Future+Electronics, ComponentLink10Description=https://datasheet.octopart.com:443/CC0603MRX7R9BB103-Yageo-datasheet-137700082.pdf?src-supplier=Future+Electronics, ComponentLink10URL=https://datasheet.octopart.com:443/CC0603MRX7R9BB103-Yageo-datasheet-137700082.pdf?src-supplier=Future+Electronics, ComponentLink11Description=https://datasheet.octopart.com:443/CC0603MRX7R9BB103-Yageo-datasheet-27626582.pdf?src-supplier=Future+Electronics, ComponentLink11URL=https://datasheet.octopart.com:443/CC0603MRX7R9BB103-Yageo-datasheet-27626582.pdf?src-supplier=Future+Electronics, ComponentLink12Description=https://datasheet.octopart.com:443/CC0603MRX7R9BB103-Yageo-datasheet-15895757.pdf?src-supplier=Future+Electronics, ComponentLink12URL=https://datasheet.octopart.com:443/CC0603MRX7R9BB103-Yageo-datasheet-15895757.pdf?src-supplier=Future+Electronics, ComponentLink13Description=https://datasheet.octopart.com:443/CC0603MRX7R9BB103-Yageo-datasheet-12526321.pdf?src-supplier=Future+Electronics, ComponentLink13URL=https://datasheet.octopart.com:443/CC0603MRX7R9BB103-Yageo-datasheet-12526321.pdf?src-supplier=Future+Electronics, ComponentLink14Description=https://datasheet.octopart.com:443/CC0603MRX7R9BB103-Yageo-datasheet-10882999.pdf?src-supplier=Future+Electronics, ComponentLink14URL=https://datasheet.octopart.com:443/CC0603MRX7R9BB103-Yageo-datasheet-10882999.pdf?src-supplier=Future+Electronics, ComponentLink15Description=https://datasheet.octopart.com:443/CC0603MRX7R9BB103-Yageo-Group-datasheet-165992755.pdf?src-supplier=ODG+(Origin+Data+Global), ComponentLink15URL=https://datasheet.octopart.com:443/CC0603MRX7R9BB103-Yageo-Group-datasheet-165992755.pdf?src-supplier=ODG+(Origin+Data+Global), ComponentLink16Description=http://sigma.octopart.com:80/conflict_mineral_statement/Yageo-company-3.pdf?src-supplier=Compliance+Statements, ComponentLink16URL=http://sigma.octopart.com:80/conflict_mineral_statement/Yageo-company-3.pdf?src-supplier=Compliance+Statements, ComponentLink17Description=http://sigma.octopart.com:80/rohs_statement/Yageo-company-2.pdf?src-supplier=Compliance+Statements, ComponentLink17URL=http://sigma.octopart.com:80/rohs_statement/Yageo-company-2.pdf?src-supplier=Compliance+Statements, Composition=Ceramic, Country of Origin="Mainland China, Taiwan", Depth=800µm, Export Control Classification Number (ECCN) Code=EAR99, Halogen Free="Halogen Free", Harmonized Tariff Schedule (HTS) Code=8532.24.00.20, Height=800µm, Introduction Date=2009-04-17, Lead Free="Lead Free", Length=1.6mm, Lifecycle Status=Production, Manufacturer Part Number=CC0603MRX7R9BB103, Material=Ceramic, Mounting Technology="Surface Mount", Number of Terminals=2, Packaging="Tape and Reel", Pins=2, Pricing="1=0.1, 10=0.032, 50=0.0214, 100=0.0182, 500=0.01294, 1000=0.01133 (USD)", Radiation Hardening=No, REACH SVHC=Yes, RoHS=Compliant, Schedule B="8532240020, 8532240020|8532240020|8532240020|8532240020|8532240020", Stock=1798, Supplier=DigiKey, Supplier 1=DigiKey, Supplier Part Number 1=311-1826-1-ND, Termination=SMD/SMT, Thickness=889µm, Voltage Rating (DC)=50V, Weight=2.012816mg, Width=800µm
C7: library part CC0805KKX5R5BB105, "6.3V 1uF X5R ±10% 0805 Multilayer Ceramic Capacitors MLCC - SMD/SMT ROHS", Case/Package=0805, Dielectric=X5R, Dielectric Material=Ceramic, Manufacturer="Yageo Group", Manufacturer Package Identifier=CC0805-0.85, Max Operating Temperature=85°C, Min Operating Temperature=-55°C, Supplier Part Number=311-3417-1-ND, Tolerance=10%, Voltage Rating=6.3V, Category="Ceramic Capacitors", China RoHS=Compliant, ComponentLink1Description=https://datasheet.octopart.com:443/CC0805KKX5R5BB105-Yageo-datasheet-170350636.pdf?src-supplier=IHS, ComponentLink1URL=https://datasheet.octopart.com:443/CC0805KKX5R5BB105-Yageo-datasheet-170350636.pdf?src-supplier=IHS, ComponentLink2Description=https://datasheet.octopart.com:443/CC0805KKX5R5BB105-Yageo-datasheet-78855689.pdf?src-supplier=Upverter, ComponentLink2URL=https://datasheet.octopart.com:443/CC0805KKX5R5BB105-Yageo-datasheet-78855689.pdf?src-supplier=Upverter, ComponentLink3Description=https://datasheet.octopart.com:443/CC0805KKX5R5BB105-Yageo-datasheet-182965640.pdf?src-supplier=Farnell, ComponentLink3URL=https://datasheet.octopart.com:443/CC0805KKX5R5BB105-Yageo-datasheet-182965640.pdf?src-supplier=Farnell, ComponentLink4Description=https://datasheet.octopart.com:443/CC0805KKX5R5BB105-Yageo-Group-datasheet-184398209.pdf?src-supplier=LCSC, ComponentLink4URL=https://datasheet.octopart.com:443/CC0805KKX5R5BB105-Yageo-Group-datasheet-184398209.pdf?src-supplier=LCSC, ComponentLink5Description=https://datasheet.octopart.com:443/CC0805KKX5R5BB105-Yageo-Group-datasheet-145016144.pdf?src-supplier=ODG+(Origin+Data+Global), ComponentLink5URL=https://datasheet.octopart.com:443/CC0805KKX5R5BB105-Yageo-Group-datasheet-145016144.pdf?src-supplier=ODG+(Origin+Data+Global), ComponentLink6Description=https://datasheet.octopart.com/CC0805KKX5R5BB105-Yageo-datasheet-86397281.pdf, ComponentLink6URL=https://datasheet.octopart.com/CC0805KKX5R5BB105-Yageo-datasheet-86397281.pdf, ComponentLink7Description=http://sigma.octopart.com:80/conflict_mineral_statement/Yageo-company-3.pdf?src-supplier=Compliance+Statements, ComponentLink7URL=http://sigma.octopart.com:80/conflict_mineral_statement/Yageo-company-3.pdf?src-supplier=Compliance+Statements, ComponentLink8Description=http://sigma.octopart.com:80/rohs_statement/Yageo-company-2.pdf?src-supplier=Compliance+Statements, ComponentLink8URL=http://sigma.octopart.com:80/rohs_statement/Yageo-company-2.pdf?src-supplier=Compliance+Statements, Country of Origin="Mainland China, Taiwan", Export Control Classification Number (ECCN) Code=EAR99, Halogen Free="Halogen Free", Harmonized Tariff Schedule (HTS) Code=8532.24.00.20, Height=1.25mm, Introduction Date=2009-04-16, Lead Free="Lead Free", Length=2mm, Lifecycle Status=Production, Manufacturer Part Number=CC0805KKX5R5BB105, Material=Ceramic, Mounting Technology="Surface Mount", Number of Terminals=2, Pricing="1=0.17, 10=0.096, 50=0.0676, 100=0.059, 500=0.0445, 1000=0.04003 (USD)", REACH SVHC=Yes, RoHS=Compliant, Schedule B="8532240020, 8532240020|8532240020, 8532240020|8532240020|8532240020, 8532240020|8532240020|8532240020|8532240020", Stock=24303, Supplier=DigiKey, Supplier 1=DigiKey, Supplier Part Number 1=311-3417-1-ND, Thickness=1.4478mm, Voltage Rating (DC)=6.3V, Width=1.25mm
C11 C26: library part C0805C472KDRACAUTO, "Cap Ceramic 0.0047uF 1000V X7R 10% Pad SMD 0805 125C Automotive AEC-Q200 Medical T/R", Case/Package=0805, Dielectric=X7R, Dielectric Material=Ceramic, Manufacturer="Yageo Group", Max Operating Temperature=125°C, Min Operating Temperature=-55°C, Ratings=AEC-Q200, Supplier Part Number=399-16659-1-ND, Voltage Rating (DC)=1kV, Category="Ceramic Capacitors", China RoHS=Compliant, ComponentLink1Description=https://datasheet.octopart.com:443/C0805C472KDRACAUTO-KEMET-datasheet-182037894.pdf?src-supplier=IHS, ComponentLink1URL=https://datasheet.octopart.com:443/C0805C472KDRACAUTO-KEMET-datasheet-182037894.pdf?src-supplier=IHS, ComponentLink2Description=https://datasheet.octopart.com:443/C0805C472KDRACAUTO-KEMET-datasheet-149524367.pdf?src-supplier=Farnell, ComponentLink2URL=https://datasheet.octopart.com:443/C0805C472KDRACAUTO-KEMET-datasheet-149524367.pdf?src-supplier=Farnell, ComponentLink3Description=https://datasheet.octopart.com:443/C0805C472KDRACAUTO-KEMET-datasheet-104412827.pdf?src-supplier=element14+APAC, ComponentLink3URL=https://datasheet.octopart.com:443/C0805C472KDRACAUTO-KEMET-datasheet-104412827.pdf?src-supplier=element14+APAC, ComponentLink4Description=https://datasheet.octopart.com:443/C0805C472KDRACAUTO-KEMET-datasheet-176334439.pdf?src-supplier=Newark, ComponentLink4URL=https://datasheet.octopart.com:443/C0805C472KDRACAUTO-KEMET-datasheet-176334439.pdf?src-supplier=Newark, ComponentLink5Description=https://datasheet.octopart.com/C0805C472KDRACAUTO-KEMET-datasheet-84169754.pdf, ComponentLink5URL=https://datasheet.octopart.com/C0805C472KDRACAUTO-KEMET-datasheet-84169754.pdf, Country of Origin=Mexico, Export Control Classification Number (ECCN) Code=EAR99, Harmonized Tariff Schedule (HTS) Code=8532.24.00.20, Height=1.25mm, Introduction Date=2012-11-28, Length=2mm, Lifecycle Status=Production, Manufacturer Part Number=C0805C472KDRACAUTO, Mounting Technology="Surface Mount", Number of Terminals=2, Pricing="1=0.28, 10=0.165, 50=0.1198, 100=0.1059, 500=0.08234, 1000=0.07509 (USD)", REACH SVHC=Yes, RoHS=Compliant, Schedule B=8532240020, Stock=30147, Supplier=DigiKey, Supplier 1=DigiKey, Supplier Part Number 1=399-16659-1-ND, Width=1.25mm